# Altium PCB HUB_1P4.pcbdoc (part 2 of 2)
Units mil, origin at the board's own origin, x right, y up, seen from the top; angles counter-clockwise.
Board outline 4467.48 x 3480.02 mil, 2 copper layers (Top Layer, Bottom Layer); 207 components, 150 nets, 727 pads, 383 vias.
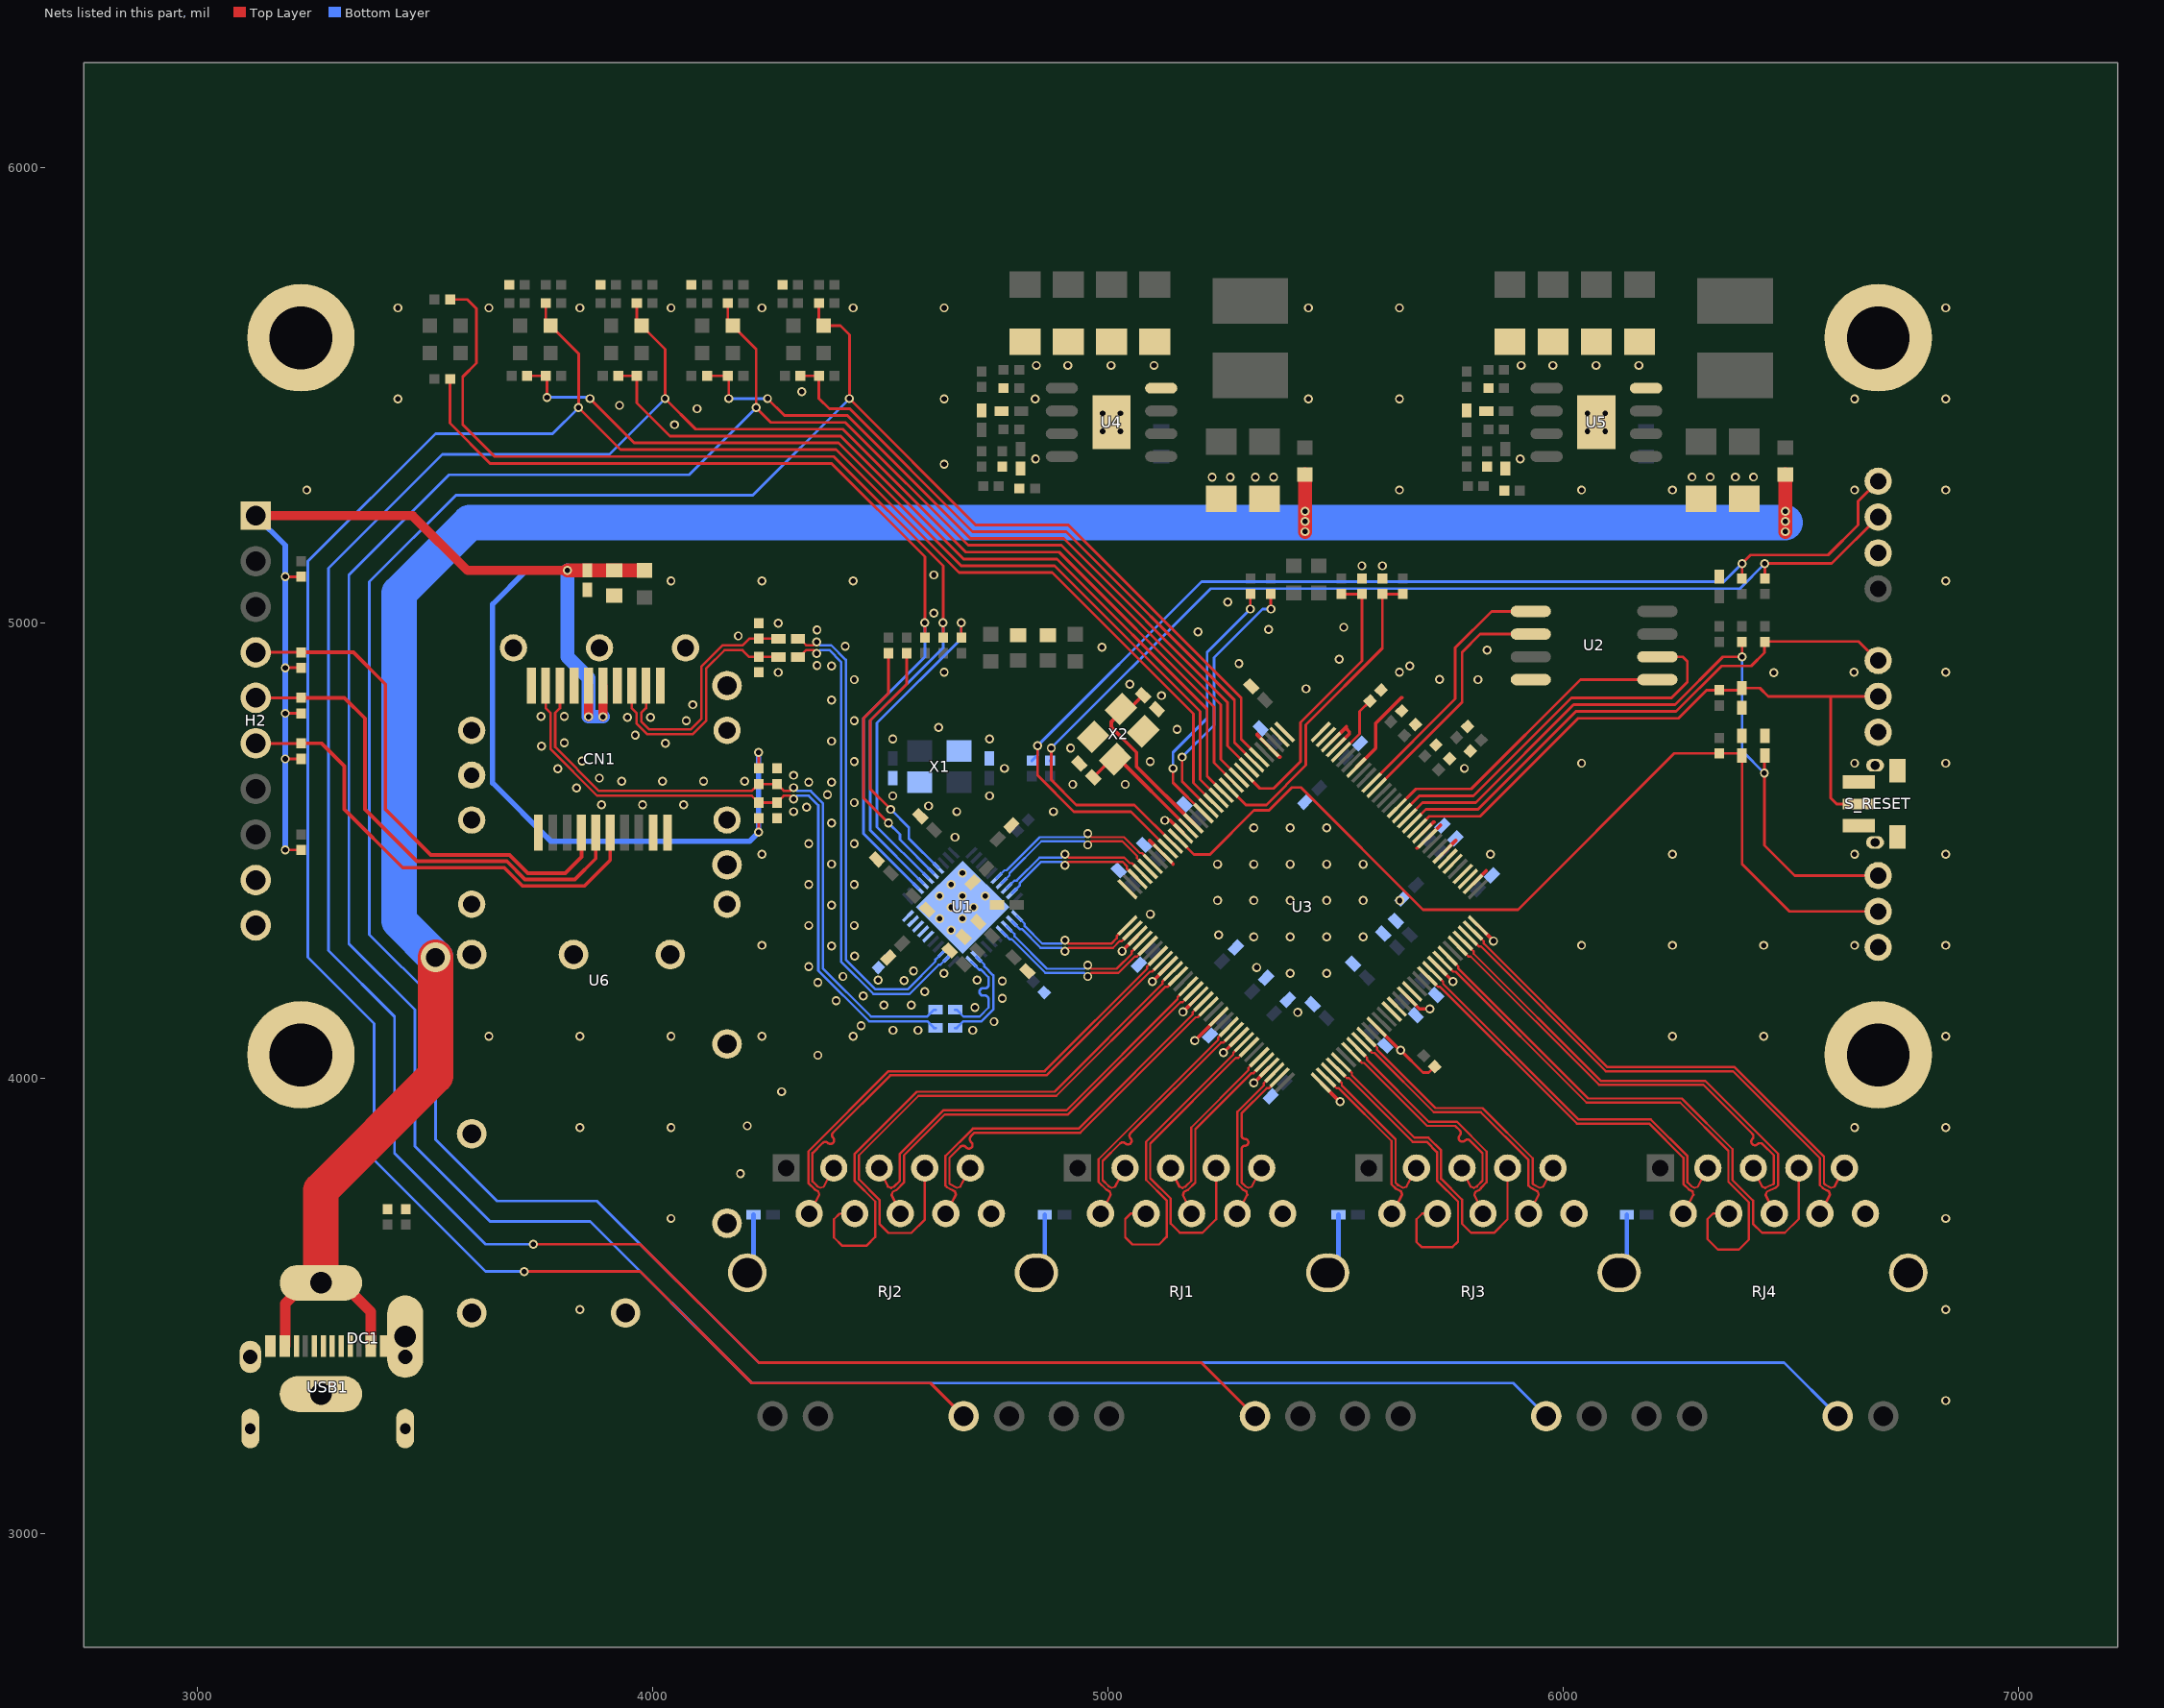
[diagram p2: the nets of this part, all layers, seen from the top]

## Via types
v1: diameter 19.68, hole 11.81, Top Layer to Bottom Layer, 250 vias
v2: diameter 19.6, hole 11.8, Top Layer to Bottom Layer, 64 vias
v3: diameter 20, hole 12, Top Layer to Bottom Layer, 36 vias
v4: diameter 24.02, hole 12.01, Top Layer to Bottom Layer, 16 vias
v5: diameter 24, hole 12, Top Layer to Bottom Layer, 15 vias
v6: diameter 34, hole 20, Top Layer to Bottom Layer, 1 vias
v7: diameter 65, hole 41, Top Layer to Bottom Layer, 1 vias

## Nets (pads, with @x,y where several pads share a name; then routed paths per layer and width w, separated by ;. In a path a pad name is that pad's centre, name@x,y a point inside that pad or via, vN(x,y) a via of type N, cw(c..) or ccw(c..) an arc to the next point about the centre after c; other vN are vias at no path point) (continued)
$5N1290: CN1.4 H2.4 R83.1 | length 1146
  Top Layer w6: H2.4@3127.44,4935.02 R83.1@3227.4,4935.02
  Top Layer w8: R83.1@3227.4,4935.02 3342.44,4935.02 3412.44,4865.02 3412.44,4590.02 3512.44,4490.02 3685.02,4490.02 3725.02,4450.02 3807.44,4450.02 3843.11,4485.69 CN1.4@3843.11,4539.24
$5N1291: CN1.5 H2.5 R86.1 | length 1105.8
  Top Layer w6: H2.5@3127.44,4835.02 R86.1@3227.4,4835.02
  Top Layer w8: R86.1@3227.4,4835.02 3322.44,4835.02 3367.44,4790.02 3367.44,4590.02 3481.44,4476.02 3679.22,4476.02 3719.22,4436.02 3828.44,4436.02 3874.61,4482.18 CN1.5@3874.61,4539.24
$5N1292: CN1.6 H2.6 R87.1 | length 1048
  Top Layer w6: H2.6@3127.44,4735.02 R87.1@3227.4,4735.02
  Top Layer w8: R87.1@3227.4,4735.02 3272.44,4735.02 3322.44,4685.02 3322.44,4590.02 3450.44,4462.02 3673.42,4462.02 3713.42,4422.02 3849.44,4422.02 3906.1,4478.68 CN1.6@3906.1,4539.24
DL: R23.1 R24.1 U3.76 | length 711.4
  Top Layer w6: U3.76@5265.16,4637.57 5302.71,4600.02 5347.44,4600.02 5434.44,4687.02 5434.44,4776.02 5602.44,4944.02 R24.1@5602.44,5062.98 R23.1@5647.44,5062.98
EN_PL: R25.1 R26.1 U3.73 | length 631.7
  Top Layer w6: U3.73@5298.54,4670.94 5333.49,4635.99 5363.42,4635.99 5422.44,4695.02 5422.44,4780.99 5557.44,4915.99 R26.1@5557.44,5062.98 R25.1@5512.44,5062.98
EN_SWR: R34.2 U3.60 | length 138.8
  Top Layer w6: U3.60@5511.8,4715.49 5552.44,4756.13 5552.44,4805.02 R34.2@5575.39,4827.97
GND: C1.2 C2.1 C3.1 C4.1 C5.1 C6.1 C7.1 C8.1 C9.1 C10.1 C11.1 C12.1 C13.1 C14.1 C15.1 C16.2 C17.2 C18.2 C19.2 C20.2 C21.2 C22.1 C23.1 C24.1 C25.1 C26.1 C27.1 C28.2 C29.1 C30.1 C31.1 C32.1 C33.2 C34.2 C35.1 C36.2 C37.1 C38.1 C39.1 C40.1 C41.1 C42.1 C43.1 C44.1 C45.1 C47.2 C48.2 C49.2 C50.2 C51.1 C52.1 C53.1 C54.1 C55.1 C57.2 C58.2 C59.2 C60.2 C61.1 C62.1 C63.1 C64.1 C65.1 C66.1 C67.1 C68.1 C69.1 C74.1 C75.1 CN1.1 CN1.9 CN1.10 CN1.11 CN1.14 CN1.17 CN1.20 DC1.2 DC1.3 GND.1 H2.9 H2.10 pad.1@6691.42,5625.73 pad.2@3226.85,5625.73 pad.3 pad.4@6691.42,4050.93 pad.7 pad.10 R9.1 R11.1 R15.1 R19.1 R24.2 R26.2 R29.1 R30.1 R31.1 R32.1 R33.1 R34.1 R41.1 R42.1 R43.2 R49.1 R50.1 R52.1 R53.1 R54.2 R58.1 R60.1 R70.1 R72.1 R84.1 R88.1 R91.1 R92.1 RJ1.P10 RJ1.SHIELD0 RJ1.SHIELD1 RJ2.P10 RJ2.SHIELD0 RJ2.SHIELD1 RJ3.P10 RJ3.SHIELD0 RJ3.SHIELD1 RJ4.P10 RJ4.SHIELD0 RJ4.SHIELD1 S_RESET.1 S_RESET.3 U1.16 U1.41 U2.4 U3.1 U3.12 U3.18 U3.24 U3.32 U3.34 U3.40 U3.43 U3.44 U3.57 U3.61 U3.62 U3.68 U3.85 U3.89 U3.96 U3.99 U3.105 U3.111 U3.115 U3.119 U3.125 U4.4 U4.9 U5.4 U5.9 U6.1 U6.2 U6.3 U6.4 U6.5 U6.6 U6.7 U6.8 U6.9 U6.10 U6.11 U6.12 U6.13 U6.14 U6.15 U6.16 U6.17 U6.18 U6.19 U6.20 USB1.1 USB1.A1B12 USB1.B1A12 X1.2 X1.4 X2.2 X2.4 | length 1922.4
  Top Layer w6: v3(5642.44,4061.02) 5691.44,4012.02 5704.44,4012.02 R19.1@5717.39,4024.97 ; 5677.44,4505.02 5679.91,4505.02 U3.43@5701.09,4526.2
  Top Layer w7.9: v3(5030.58,4278.82) U3.99@5064.7,4312.94 ; 5091.29,4521.81 U3.89@5120.35,4492.75 5142.44,4470.66 5142.44,4470.02 ; v3(5097.44,4212) U3.105@5131.56,4246.11 ; 5135.84,4566.35 U3.85@5164.89,4537.3 ; v3(5164.26,4145.18) U3.111@5198.38,4179.29 ; v3(5190.44,4082.02) 5190.44,4082.26 U3.115@5242.89,4134.74 ; v3(5253.36,4056.08) U3.119@5287.47,4090.2 ; v3(5320.11,3989.33) U3.125@5354.19,4023.45 ; 5327.44,4755.02 5327.44,4753.48 U3.68@5354.26,4726.66 5375.9,4705.02 5377.44,4705.02 ; U3.1@5467.25,3990 v3(5509.29,3948) ; U3.62@5489.53,4737.77 5523.58,4771.82 5523.58,4766.83 5529.68,4760.73 5529.68,4755.72 U3.61@5500.63,4726.66 ; U3.57@5545.18,4682.12 5587.5,4724.44 5587.5,4778.91 5644,4835.41 5645,4835.41 ; U3.12@5589.76,4112.47 5641.21,4061.02 v3(5642.44,4061.02) ; U3.18@5656.58,4179.29 5683.86,4152.02 v3(5706.44,4152.02) ; U3.44@5689.99,4537.3 5714.71,4562.02 5716.44,4562.02 ; U3.43@5701.09,4526.2 5730.15,4555.25 ; U3.24@5723.37,4246.11 v3(5757.52,4212) ; U3.40@5734.54,4492.75 5763.59,4521.81 ; U3.34@5801.29,4426 5830.34,4455.05 ; U3.32@5812.46,4335.21 v3(5846.62,4301.09)
  Bottom Layer w10: RJ2.SHIELD1@4207.48,3572.5 4220.98,3586 C65.1@4220.98,3700.02 ; RJ1.SHIELD1@4847.48,3572.5 4860.98,3586 C64.1@4860.98,3700.02 ; RJ3.SHIELD1@5487.48,3572.5 5505.98,3591 C66.1@5505.98,3700.02 ; RJ4.SHIELD1@6127.48,3572.5 6139.48,3584.5 C67.1@6139.48,3700.02
  other v1: 4192.44,3790.02 4207.44,3895.02 4282.44,3970.02 4362.44,4050.02 4527.44,4105.02 4582.44,4105.02 4702.44,4105.02 4457.44,4115.02 4749.44,4124.02 4707.44,4155.02 4507.44,4160.02 4567.44,4160.02 4402.44,4170.02 4767.44,4175.02 4462.44,4180.02 4597.44,4190.02 4362.44,4210.02 4767.44,4213.02 4551.44,4214.02 4495.04,4214.85 4712.44,4215.02 4417.44,4223.02 4639.44,4230.02 4572.44,4235.02 4342.44,4245.02 4443.44,4268.02 4392.44,4290.02 4655,4325.02 4342.44,4335.02 4442.44,4335.02 4630,4350.02 4680,4350.02 4655,4375.02 4705,4375.02 4392.44,4380.02 4630,4400.02 4680,4400.02 4730,4400.02 4342.44,4425.02 4442.44,4425.02 4655,4425.02 4680,4450.02 4392.44,4470.02 4342.44,4515.02 4442.44,4515.02 4663.42,4528.93 4392.44,4560.02 5124.44,4566.02 4309.44,4585.02 4667.44,4585.02 4880,4585.02 4337.44,4595.02 4605.45,4597.62 3887.44,4600.02 3977.44,4600.02 4067.44,4600.02 4442.44,4605.02 4527.05,4619.63 4739.19,4619.63 4383.44,4622.02 3832.44,4637.02 4922.44,4645.02 5037.44,4645.02 4342.44,4650.02 4392.44,4650.02 3931.44,4652.02 4021.44,4652.02 4111.44,4652.02 4201.44,4652.02 3882.48,4658.66 4309.33,4664.95 3791.44,4679.02 4772.44,4680.02 5782.44,4680.02 4442.44,4695.02 5092.44,4695.02 3844.44,4696.02 4917.44,4725.02 3755.44,4729.02 4027.44,4735.02 3805.44,4736.02 4392.44,4740.02 4527.05,4744.82 4739.73,4744.82 3961.44,4753.02 5151.42,4765.93 4627.44,4770.02 4073.44,4785.02 4442.44,4785.02 3943.99,4792.02 3994.44,4792.02 3754.34,4794.02 3805.44,4794.02 4087.44,4820.02 4392.44,4830.02 5117.44,4840.02 5435,4855.02 5047.44,4865.02 4442.44,4875.02 5812.44,4875.02 4275.44,4890.73 4392.44,4905.02 5662.44,4905.02 4360.44,4906.02 5287.44,4910.02 5507.44,4920.02 5832.44,4940.02 4986.42,4945.93 4422.44,4948.02 4187.44,4971.02 5197.44,4980.02 4360.44,4984.02 5352.44,4985.02 5517.44,4990.02 4275.44,4999.02 4617.44,5021.02 5262.44,5045.02 4617.44,5105.02 5557.44,5125.02 5602.44,5125.02 5228.4,5319.68 5268.4,5319.68 5323.4,5319.97 5363.4,5319.97 6282.44,5320.02 6322.44,5320.02 6377.44,5320.02 6417.44,5320.02 4840.44,5360.02 5905.44,5360.02 4047.44,5435.02 4097.44,5470.02 3926.81,5477.26 4326.81,5507.26 4842.44,5565.02 4911.62,5565.02 5006.55,5565.02 5100.84,5565.02 5907.44,5565.02 5976.62,5565.02 6071.55,5565.02 6165.84,5565.02
  other v2: 6839.8,3291.52 3839.8,3491.52 6839.8,3491.52 4039.8,3691.52 6839.8,3691.52 3839.8,3891.52 4039.8,3891.52 6639.8,3891.52 6839.8,3891.52 3639.8,4091.52 3839.8,4091.52 4039.8,4091.52 4239.8,4091.52 4439.8,4091.52 6239.8,4091.52 6439.8,4091.52 6839.8,4091.52 4239.8,4291.52 6039.8,4291.52 6239.8,4291.52 6439.8,4291.52 6639.8,4291.52 6839.8,4291.52 4239.8,4491.52 5839.8,4491.52 6239.8,4491.52 6639.8,4491.52 6839.8,4491.52 6039.8,4691.52 6639.8,4691.52 6839.8,4691.52 6462.44,4890.02 4639.8,4891.52 5639.8,4891.52 6638.14,4891.52 6839.8,4891.52 4039.8,5091.52 4239.8,5091.52 4439.8,5091.52 6839.8,5091.52 3239.8,5291.52 5639.8,5291.52 6039.8,5291.52 6239.8,5291.52 6639.8,5291.52 6839.8,5291.52 4639.8,5347.88 3439.8,5491.52 4639.8,5491.52 4839.8,5491.52 5439.8,5491.52 5639.8,5491.52 6639.8,5491.52 6839.8,5491.52 3439.8,5691.52 3639.8,5691.52 3839.8,5691.52 4039.8,5691.52 4239.8,5691.52 4439.8,5691.52 4639.8,5691.52 5439.8,5691.52 5639.8,5691.52 6839.8,5691.52
  other v3: 5416.44,4144.02 5400.11,4229.81 5480.11,4229.81 5326.44,4243.02 5320.11,4309.81 5400.11,4309.81 5480.11,4309.81 5560.11,4309.81 5242.44,4314.02 5092.44,4360.02 5240.11,4389.81 5320.11,4389.81 5400.11,4389.81 5480.11,4389.81 5560.11,4389.81 5640.11,4389.81 5240.11,4469.81 5320.11,4469.81 5400.11,4469.81 5480.11,4469.81 5560.11,4469.81 5320.11,4549.81 5400.11,4549.81 5480.11,4549.81 5728.01,4875.72
GPIO03: C35.2 GPIO03.1 pad.8 R28.1 U3.47 | length 1672.2
  Top Layer w6: U3.47@5656.58,4570.75 5690.86,4605.02 5807.44,4605.02 6022.44,4820.02 6245.47,4820.02 6350.47,4925.02 v1(6392.44,4925.02) R28.1@6392.44,4957.98 ; C35.2@6441.42,4714.47 v1(6441.42,4669.62) 6441.42,4511.04 6507.84,4444.63 pad.8@6691.42,4444.63
  Bottom Layer w6: v1(6392.44,4925.02) 6392.44,4718.59 v1(6441.42,4669.62)
HSIN: C73.2 U1.13 | length 1066.5
  Top Layer w5.4: C73.2@4318.9,4965.02 4322.44,4965.02 4337.04,4950.42 4352.76,4950.42 v1(4360.1,4957.76)
  Bottom Layer w5.4: v1(4360.1,4957.76) 4367.44,4950.42 4391.75,4950.42 4423.9,4918.27 4423.9,4259.77 4488.65,4195.02 4559.46,4195.02 4620.72,4256.28 4620.72,4260.06 U1.13@4638.26,4277.6
HSIP: C72.2 U1.12 | length 1075.3
  Top Layer w5.4: C72.2@4318.9,4925.02 4322.44,4925.02 4337.44,4940.02 4352.76,4940.02 v1(4360.1,4932.68)
  Bottom Layer w5.4: v1(4360.1,4932.68) 4367.44,4940.02 4387.44,4940.02 4413.5,4913.96 4413.5,4255.46 4484.34,4184.62 4563.77,4184.62 4628.07,4248.93 4631.86,4248.93 U1.12@4649.4,4266.46
HSON: C70.2 U1.9 | length 232
  Bottom Layer w5.4: C70.2@4663.9,4110.02 4667.44,4110.02 4682.04,4124.62 4721.75,4124.62 4747.84,4150.71 4747.84,4225.44 4728.14,4245.14 4728.14,4248.93 U1.9@4710.6,4266.46
HSOP: C71.2 U1.10 | length 232.3
  Bottom Layer w5.4: C71.2@4663.9,4150.02 4667.44,4150.02 4682.44,4135.02 4717.44,4135.02 4737.44,4155.02 4737.44,4172.97 ccw(c4729.34,4172.97) 4729.34,4181.07 4725.59,4181.07 cw(c4725.59,4189.17) 4717.49,4189.17 cw(c4725.59,4189.17) 4725.59,4197.27 4729.34,4197.27 ccw(c4729.34,4205.37) 4737.44,4205.37 4737.44,4221.14 4720.79,4237.79 4717.01,4237.79 U1.10@4699.47,4255.33
HW_RESTE: C26.2 HW_RESET.1 pad.9 R18.1 U3.86 | length 2149.5
  Top Layer w6: U3.86@5153.79,4526.2 5188.74,4491.25 5223.67,4491.25 5320.44,4588.02 5353.44,4588.02 5403.44,4638.02 5423.44,4638.02 5691.44,4370.02 5900.51,4370.02 6243.47,4712.98 R18.1@6342.44,4712.98 6388.02,4712.98 C26.2@6392.44,4708.56 6392.44,4470.02 6496.58,4365.89 pad.9@6691.42,4365.89
P0_LED0: R56.2 U3.81 | length 579.3
  Top Layer w6: v1(5142.44,4680.02) 5142.44,4648.85 U3.81@5209.44,4581.85 ; v1(5312.44,5030.02) R56.2@5312.44,5062.98
  Bottom Layer w6: v1(5142.44,4680.02) 5142.44,4715.02 5217.44,4790.02 5217.44,4935.02 v1(5312.44,5030.02)
P0_LED1: R55.2 U3.80 | length 585.6
  Top Layer w6: v1(5162.44,4705.02) 5162.44,4651.19 U3.80@5220.61,4593.02 ; v1(5357.44,5030.02) R55.2@5357.44,5062.98
  Bottom Layer w6: v1(5162.44,4705.02) 5232.44,4775.02 5232.44,4923.37 5339.09,5030.02 v1(5357.44,5030.02)
P0MDIAN: U1.37 U3.92 | length 396.1
  Top Layer w5: v1(4955.28,4512.18) 4963.13,4520.02 5031.14,4520.02 5063.32,4487.84 5063.32,4483.03 U3.92@5086.97,4459.38
  Bottom Layer w5: U1.37@4766.28,4427.9 4783.4,4445.01 4783.4,4449.78 4853.63,4520.02 4947.44,4520.02 v1(4955.28,4512.18)
P0MDIAP: U1.36 U3.91 | length 411
  Top Layer w5: v1(4955.28,4536.86) 4963.13,4529.02 5034.86,4529.02 5069.68,4494.2 5074.49,4494.2 U3.91@5098.14,4470.55
  Bottom Layer w5: U1.36@4755.14,4439.03 4772.26,4456.15 4777.03,4456.15 4849.9,4529.02 4947.44,4529.02 v1(4955.28,4536.86)
P0MDIBN: U1.39 U3.94 | length 332.7
  Top Layer w5: v1(4905.28,4467.18) 4913.13,4475.02 5031.59,4475.02 5041.04,4465.57 5041.04,4460.76 U3.94@5064.7,4437.1
  Bottom Layer w5: U1.39@4788.56,4405.62 4805.67,4422.74 4805.67,4427.51 4853.18,4475.02 4897.44,4475.02 v1(4905.28,4467.18)
P0MDIBP: U1.38 U3.93 | length 347.6
  Top Layer w5: v1(4905.28,4491.86) 4913.13,4484.02 5035.32,4484.02 5047.41,4471.93 5052.22,4471.93 U3.93@5075.87,4448.28
  Bottom Layer w5: U1.38@4777.42,4416.76 4794.53,4433.87 4799.31,4433.87 4849.45,4484.02 4897.44,4484.02 v1(4905.28,4491.86)
P0MDICN: U1.2 U3.98 | length 311.4
  Top Layer w5: v1(4905.28,4278.18) 4913.13,4286.02 5010.7,4286.02 5025.13,4300.45 5029.87,4300.45 U3.98@5053.52,4324.11
  Bottom Layer w5: U1.2@4788.56,4344.42 4805.67,4327.3 4810.44,4327.3 4851.72,4286.02 4897.44,4286.02 v1(4905.28,4278.18)
P0MDICP: U1.1 U3.97 | length 296.5
  Top Layer w5: v1(4905.28,4302.86) 4913.13,4295.02 5006.97,4295.02 5018.77,4306.82 5018.77,4311.56 U3.97@5042.42,4335.21
  Bottom Layer w5: U1.1@4799.69,4355.55 4816.81,4338.44 4816.81,4333.67 4855.45,4295.02 4897.44,4295.02 v1(4905.28,4302.86)
P0MDIDN: U1.4 U3.101 | length 389.6
  Top Layer w5: v1(4955.28,4223.18) 4963.13,4231.02 5022.52,4231.02 5058.51,4267.01 5063.32,4267.01 U3.101@5086.97,4290.66
  Bottom Layer w5: U1.4@4766.28,4322.14 4783.4,4305.03 4788.17,4305.03 4862.18,4231.02 4947.44,4231.02 v1(4955.28,4223.18)
P0MDIDP: U1.3 U3.100 | length 374.7
  Top Layer w5: v1(4955.28,4247.86) 4963.13,4240.02 5018.79,4240.02 5052.14,4273.37 5052.14,4278.18 U3.100@5075.8,4301.83
  Bottom Layer w5: U1.3@4777.42,4333.28 4794.53,4316.16 4794.53,4311.39 4865.9,4240.02 4947.44,4240.02 v1(4955.28,4247.86)
P1_LED0: LED5.1 R62.2 RJ2.13 U3.79 | length 5740.4
  Top Layer w6: v1(3717.44,3575.02) 3972.44,3575.02 4217.44,3330.02 4609.86,3330.02 RJ2.13@4682.48,3257.4 ; R62.2@3764.77,5702.26 3764.77,5662.77 3836.81,5590.73 v1(3836.81,5472.26) 3929.05,5380.02 4402.44,5380.02 4672.44,5110.02 4877.44,5110.02 5187.44,4800.02 5187.44,4648.4 U3.79@5231.71,4604.12
  Bottom Layer w6: v1(3717.44,3575.02) 3632.44,3575.02 3387.44,3820.02 3387.44,4120.02 3242.44,4265.02 3242.44,5135.02 3522.44,5415.02 3779.57,5415.02 v1(3836.81,5472.26)
P1_LED1: R65.2 R68.2 U3.78 | length 2013.1
  Top Layer w6: R65.2@3723.85,5542.26 R68.2@3764.77,5542.26 ; v1(3767.44,5495.02) R68.2@3767.44,5539.93 ; v1(3861.81,5492.26) 3959.05,5395.02 4407.44,5395.02 4677.44,5125.02 4882.44,5125.02 5202.44,4805.02 5202.44,4655.74 U3.78@5242.89,4615.29
  Bottom Layer w6: v1(3767.44,5495.02) 3859.05,5495.02 v1(3861.81,5492.26)
P1MDIAN: RJ2.P3 U3.104 | length 1102
  Top Layer w5: RJ2.P3@4397.28,3802.4 4374.98,3761.03 4367.8,3758.88 4361.19,3762.44 4350.55,3773.08 4350.55,3835.02 4373.12,3857.6 cw(c4378.78,3851.94) 4384.44,3857.6 ccw(c4390.09,3863.25) 4395.75,3857.6 ccw(c4390.09,3863.25) 4395.75,3868.91 cw(c4401.41,3874.57) 4395.75,3880.22 4521.55,4006.02 4864.38,4006.02 5091.99,4233.63 5096.73,4233.63 U3.104@5120.38,4257.29
P1MDIAP: RJ2.P2 U3.103 | length 1101.3
  Top Layer w5: RJ2.P2@4343.38,3702.4 4365.68,3743.77 4363.53,3750.95 4355.76,3755.14 4341.55,3769.36 4341.55,3838.75 4517.82,4015.02 4860.65,4015.02 5085.63,4240 5085.63,4244.73 U3.103@5109.28,4268.39
P1MDIBN: RJ2.P7 U3.107 | length 1266.9
  Top Layer w5: RJ2.P7@4597.28,3802.4 4597.42,3802.26 4597.42,3689.46 4567.62,3659.66 4517.62,3659.66 4497.62,3679.66 4497.62,3732.61 4452.48,3777.75 4452.48,3830.02 4583.48,3961.02 4886.2,3961.02 5125.37,4200.19 5130.18,4200.19 U3.107@5153.79,4223.84
P1MDIBP: RJ2.P4 U3.106 | length 1267
  Top Layer w5: RJ2.P4@4443.38,3702.4 4443.02,3702.04 4410,3702.04 4397.62,3689.66 4397.62,3649.88 4415.88,3631.62 4469.08,3631.62 4488.62,3651.16 4488.62,3728.88 4443.48,3774.02 4443.48,3833.75 4579.75,3970.02 4882.47,3970.02 5119,4206.55 5119,4211.36 U3.106@5142.66,4235.01
P1MDICN: RJ2.P6 U3.110 | length 929.3
  Top Layer w5: RJ2.P6@4543.38,3702.4 4524.43,3743.5 4527.03,3750.53 4535.3,3754.35 4551.48,3770.53 4551.48,3830.02 4641.48,3920.02 4912.02,3920.02 5158.81,4166.81 5163.55,4166.81 U3.110@5187.17,4190.46
P1MDICP: RJ2.P5 U3.109 | length 926
  Top Layer w5: RJ2.P5@4497.28,3802.4 4516.23,3761.3 4523.26,3758.71 4530.07,3761.85 4542.48,3774.25 4542.48,3833.75 4637.75,3929.02 4908.29,3929.02 5152.45,4173.18 5152.45,4177.91 U3.109@5176.07,4201.57
P1MDIDN: RJ2.P9 U3.113 | length 859.8
  Top Layer w5: RJ2.P9@4697.28,3802.4 4674.98,3761.03 4667.8,3758.88 4651.58,3767.62 4651.58,3825.02 4675.57,3849.01 cw(c4681.23,3843.36) 4686.89,3849.01 4688.52,3847.38 ccw(c4694.18,3853.03) 4699.84,3847.38 ccw(c4694.18,3853.03) 4699.84,3858.69 4698.2,3860.33 cw(c4703.86,3865.99) 4698.2,3871.64 4706.58,3880.02 4938.84,3880.02 5192.19,4133.37 5197,4133.37 U3.113@5220.65,4157.02
P1MDIDP: RJ2.P8 U3.112 | length 854.5
  Top Layer w5: RJ2.P8@4643.38,3702.4 4665.68,3743.77 4663.53,3750.95 4646.15,3760.32 4642.58,3763.89 4642.58,3828.75 4702.85,3889.02 4935.12,3889.02 5185.83,4139.73 5185.83,4144.54 U3.112@5209.48,4168.19
P2_LED0: LED6.1 R61.2 RJ1.13 U3.75 | length 6274.3
  Top Layer w6: v1(3737.44,3635.02) 3972.44,3635.02 4232.44,3375.02 5204.86,3375.02 RJ1.13@5322.48,3257.4 ; R61.2@3964.77,5702.26 3964.77,5662.77 4026.81,5600.73 v1(4026.81,5492.26) 4094.05,5425.02 4417.44,5425.02 4687.44,5155.02 4892.44,5155.02 5232.44,4815.02 5232.44,4692.49 U3.75@5276.26,4648.67
  Bottom Layer w6: v1(3737.44,3635.02) 3632.44,3635.02 3432.44,3835.02 3432.44,4135.02 3287.44,4280.02 3287.44,5120.02 3537.44,5370.02 3904.57,5370.02 v1(4026.81,5492.26)
P2_LED1: R63.2 R67.2 U3.77 | length 1830.6
  Top Layer w6: R63.2@3923.85,5542.26 R67.2@3964.77,5542.26 3964.77,5482.69 4037.44,5410.02 4412.44,5410.02 4682.44,5140.02 4887.44,5140.02 5217.44,4810.02 5217.44,4662.94 U3.77@5253.99,4626.4
P2MDIAN: RJ1.P3 U3.118 | length 546.8
  Top Layer w5: RJ1.P3@5037.28,3802.4 5014.98,3761.03 5007.8,3758.88 5001.19,3762.44 4988.05,3775.58 4988.05,3817.85 5026.53,3856.34 cw(c5032.19,3850.68) 5037.84,3856.34 ccw(c5043.5,3861.99) 5049.16,3856.34 ccw(c5043.5,3861.99) 5049.16,3867.65 cw(c5054.81,3873.31) 5049.16,3878.96 5247.91,4077.72 5252.65,4077.72 U3.118@5276.26,4101.37
P2MDIAP: RJ1.P2 U3.117 | length 546.1
  Top Layer w5: RJ1.P2@4983.38,3702.4 5005.68,3743.77 5003.53,3750.95 4995.76,3755.14 4979.05,3771.86 4979.05,3821.58 5241.55,4084.08 5241.55,4088.82 U3.117@5265.16,4112.47
P2MDIBN: RJ1.P7 U3.121 | length 732.2
  Top Layer w5: RJ1.P7@5237.28,3802.4 5237.28,3690.16 5207.48,3660.36 5157.48,3660.36 5137.48,3680.36 5137.48,3735.02 5092.48,3780.02 5092.48,3856.31 5280.44,4044.27 5286.09,4044.27 U3.121@5309.71,4067.92
P2MDIBP: RJ1.P4 U3.120 | length 731.7
  Top Layer w5: RJ1.P4@5083.38,3702.4 5083.04,3702.74 5049.86,3702.74 5037.48,3690.36 5037.48,3650.02 5053.08,3634.42 5111.88,3634.42 5128.48,3651.02 5128.48,3731.29 5083.48,3776.29 5083.48,3860.04 5274.92,4051.48 5274.92,4055.44 U3.120@5298.57,4079.1
P2MDICN: RJ1.P6 U3.124 | length 414.4
  Top Layer w5: RJ1.P6@5183.38,3702.4 5164.43,3743.5 5167.03,3750.53 5175.3,3754.35 5191.48,3770.53 5191.48,3887.71 5314.66,4010.89 5319.47,4010.89 U3.124@5343.08,4034.55
P2MDICP: RJ1.P5 U3.123 | length 411.2
  Top Layer w5: RJ1.P5@5137.28,3802.4 5156.23,3761.3 5163.26,3758.71 5170.07,3761.85 5182.48,3774.25 5182.48,3891.44 5308.3,4017.26 5308.3,4022.07 U3.123@5331.95,4045.72
P2MDIDN: RJ1.P9 U3.127 | length 358.6
  Top Layer w5: RJ1.P9@5337.28,3802.4 5314.98,3761.03 5307.8,3758.88 5301.19,3762.44 5293.05,3770.58 5293.05,3843.87 cw(c5300.55,3843.87) 5300.55,3851.37 ccw(c5300.55,3858.87) 5308.05,3858.87 ccw(c5300.55,3858.87) 5300.55,3866.37 cw(c5300.55,3873.87) 5293.05,3873.87 5293.05,3922.46 5348.11,3977.52 5352.84,3977.52 U3.127@5376.46,4001.17
P2MDIDP: RJ1.P8 U3.126 | length 359
  Top Layer w5: RJ1.P8@5283.38,3702.4 5305.68,3743.77 5303.53,3750.95 5295.76,3755.14 5284.05,3766.86 5284.05,3926.19 5341.74,3983.88 5341.74,3988.62 U3.126@5365.36,4012.27
P3_LED0: LED8.2 R73.2 RJ3.13 U3.74 | length 6815.3
  Top Layer w6: R73.2@4164.77,5702.26 4164.77,5662.77 4226.81,5600.73 v1(4226.81,5472.26) 4259.05,5440.02 4422.44,5440.02 4692.44,5170.02 4897.44,5170.02 5247.44,4820.02 5247.44,4699.84 U3.74@5287.44,4659.84
  Bottom Layer w6: v1(4226.81,5472.26) 4079.57,5325.02 3552.44,5325.02 3332.44,5105.02 3332.44,4295.02 3477.44,4150.02 3477.44,3850.02 3642.44,3685.02 3862.44,3685.02 4217.44,3330.02 5889.86,3330.02 RJ3.13@5962.48,3257.4
P3_LED1: R75.2 R79.2 U3.72 | length 1631.3
  Top Layer w6: R75.2@4118.85,5542.26 R79.2@4164.77,5542.26 4166.81,5540.22 v1(4166.81,5492.26) ; v1(4251.81,5492.26) 4289.05,5455.02 4427.44,5455.02 4697.44,5185.02 4902.44,5185.02 5262.44,4825.02 5262.44,4729.38 U3.72@5309.71,4682.12
  Bottom Layer w6: v1(4166.81,5492.26) v1(4251.81,5492.26)
P3LED0: R1.1 U1.27 | length 566.8
  Top Layer w6: v1(4522.44,4590.02) 4477.44,4635.02 4477.44,4785.02 4557.44,4865.02 R1.1@4557.44,4932.98
  Bottom Layer w6: v1(4522.44,4590.02) 4562.44,4550.02 4562.44,4525.98 U1.27@4627.12,4461.3
P3LED1: R95.1 U1.26 | length 569.2
  Top Layer w6: v1(4517.44,4560.02) 4462.44,4615.02 4462.44,4790.02 4517.44,4845.02 R95.1@4517.44,4932.98
  Bottom Layer w6: v1(4517.44,4560.02) 4542.44,4535.02 4542.44,4523.71 U1.26@4615.99,4450.16
P3LED2: R2.2 U1.25 | length 717.1
  Top Layer w6: R2.2@4677.44,4967.06 v1(4677.44,5000.02)
  Bottom Layer w6: U1.25@4604.86,4439.03 4492.44,4551.45 4492.44,4780.02 4677.44,4965.02 v1(4677.44,5000.02)
P3MDIAN: RJ3.P3 U3.3 | length 375.5
  Top Layer w5: U3.3@5489.56,4012.27 5513.22,3988.62 5513.22,3983.88 5631.48,3865.62 5631.48,3770.02 5636.57,3764.93 5647.8,3758.88 5654.98,3761.03 RJ3.P3@5677.28,3802.4
P3MDIAP: RJ3.P2 U3.2 | length 378.1
  Top Layer w5: U3.2@5478.46,4001.17 5502.12,3977.52 5506.85,3977.52 5622.48,3861.89 5622.48,3766.29 5631.14,3757.63 5643.53,3750.95 5645.68,3743.77 RJ3.P2@5623.38,3702.4
P3MDIBN: RJ3.P7 U3.5 | length 715.7
  Top Layer w5: U3.5@5511.8,4034.55 5535.49,4010.89 5535.49,4006.16 5672.63,3869.02 5703.48,3869.02 5731.48,3841.02 5731.48,3778.75 5777.48,3732.75 5777.48,3680 5797.48,3660 5847.48,3660 5877.28,3689.8 RJ3.P7@5877.28,3802.4
P3MDIBP: RJ3.P4 U3.4 | length 715.7
  Top Layer w5: U3.4@5500.7,4023.45 5524.39,3999.79 5529.13,3999.79 5668.9,3860.02 5699.75,3860.02 5722.48,3837.29 5722.48,3775.02 5768.48,3729.02 5768.48,3641.02 5756.48,3629.02 5688.48,3629.02 5677.48,3640.02 5677.48,3690 5689.86,3702.38 RJ3.P4@5723.38,3702.4
P3MDICN: RJ3.P6 U3.8 | length 536.9
  Top Layer w5: U3.8@5545.18,4067.92 5568.87,4044.27 5568.87,4039.53 5704.38,3904.02 5766.21,3904.02 5831.48,3838.75 5831.48,3771.29 5819.07,3758.89 5819.07,3758.12 5815.3,3754.35 5807.03,3750.53 5804.43,3743.5 RJ3.P6@5823.38,3702.4
P3MDICP: RJ3.P5 U3.7 | length 537.1
  Top Layer w5: U3.7@5534.07,4056.82 5557.77,4033.17 5562.5,4033.17 5700.65,3895.02 5762.48,3895.02 5772.26,3885.24 cw(c5766.6,3879.58) 5772.26,3873.93 ccw(c5777.92,3868.27) 5772.26,3862.61 ccw(c5777.92,3868.27) 5783.57,3862.61 cw(c5789.23,3856.95) 5794.89,3862.61 5822.48,3835.02 5822.48,3775.02 5810.07,3762.61 5810.07,3761.85 5803.26,3758.71 5796.23,3761.3 RJ3.P5@5777.28,3802.4
P3MDIDN: RJ3.P9 U3.10 | length 606.5
  Top Layer w5: U3.10@5567.49,4090.2 5591.14,4066.54 5591.14,4061.81 5718.93,3934.02 5822.21,3934.02 5932.48,3823.75 5932.48,3767.54 5933.36,3766.66 5947.8,3758.88 5954.98,3761.03 RJ3.P9@5977.28,3802.4
P3MDIDP: RJ3.P8 U3.9 | length 609.1
  Top Layer w5: U3.9@5556.39,4079.1 5580.04,4055.44 5584.78,4055.44 5715.2,3925.02 5818.48,3925.02 5923.48,3820.02 5923.48,3763.81 5927.93,3759.36 5943.53,3750.95 5945.68,3743.77 RJ3.P8@5923.38,3702.4
P4_LED0: LED10.1 R74.2 RJ4.13 U3.70 | length 7376.8
  Top Layer w6: R74.2@4364.77,5702.26 4364.77,5662.77 LED10.1@4375.31,5652.26 4411.81,5652.26 4431.81,5632.26 v1(4431.81,5492.26) 4709.05,5215.02 4912.44,5215.02 5292.44,4835.02 5292.44,4743.93 U3.70@5331.98,4704.39
  Bottom Layer w6: v1(4431.81,5492.26) 4219.57,5280.02 3567.44,5280.02 3377.44,5090.02 3377.44,4315.02 3522.44,4170.02 3522.44,3865.02 3657.44,3730.02 3877.44,3730.02 4232.44,3375.02 6484.86,3375.02 RJ4.13@6602.48,3257.4
P4_LED1: R77.2 R80.2 U3.71 | length 1432.4
  Top Layer w6: R77.2@4323.85,5542.26 R80.2@4364.77,5542.26 4364.77,5492.69 4387.44,5470.02 4432.44,5470.02 4702.44,5200.02 4907.44,5200.02 5277.44,4830.02 5277.44,4736.59 U3.71@5320.81,4693.22
P4MDIAN: RJ4.P3 U3.23 | length 863.2
  Top Layer w5: U3.23@5712.26,4235.01 5735.96,4211.36 5735.96,4206.55 6033.49,3909.02 6192.21,3909.02 6272.48,3828.75 6272.48,3771.15 6281.19,3762.44 6287.8,3758.88 6294.98,3761.03 RJ4.P3@6317.28,3802.4
P4MDIAP: RJ4.P2 U3.22 | length 865.8
  Top Layer w5: U3.22@5701.09,4223.84 5724.78,4200.19 5729.59,4200.19 6029.76,3900.02 6188.48,3900.02 6263.48,3825.02 6263.48,3767.42 6275.76,3755.14 6283.53,3750.95 6285.68,3743.77 RJ4.P2@6263.38,3702.4
P4MDIBN: RJ4.P7 U3.26 | length 1220
  Top Layer w5: U3.26@5745.68,4268.39 5769.33,4244.73 5769.33,4240 6054.31,3955.02 6260.21,3955.02 6371.48,3843.75 6371.48,3776.02 6416.48,3731.02 6416.48,3680.15 6436.48,3660.15 6486.48,3660.15 6517.28,3690.95 RJ4.P7@6517.28,3802.4
P4MDIBP: RJ4.P4 U3.25 | length 1220
  Top Layer w5: U3.25@5734.58,4257.29 5758.23,4233.63 5762.97,4233.63 6050.58,3946.02 6256.48,3946.02 6362.48,3840.02 6362.48,3772.29 6407.48,3727.29 6407.48,3645.02 6385.78,3623.32 6339.18,3623.32 6316.48,3646.02 6316.48,3690.15 6328.86,3702.53 6363.25,3702.53 RJ4.P4@6363.38,3702.4
P4MDICN: RJ4.P6 U3.29 | length 1039.6
  Top Layer w5: U3.29@5779.09,4301.83 5802.78,4278.18 5802.78,4273.37 6082.13,3994.02 6311.21,3994.02 6471.48,3833.75 6471.48,3764.36 6466.74,3759.62 6447.03,3750.53 6444.43,3743.5 RJ4.P6@6463.38,3702.4
P4MDICP: RJ4.P5 U3.28 | length 1039.7
  Top Layer w5: U3.28@5767.95,4290.66 5791.61,4267.01 5796.41,4267.01 6078.4,3985.02 6307.48,3985.02 6415.07,3877.43 cw(c6409.42,3871.77) 6415.07,3866.11 ccw(c6420.73,3860.45) 6415.07,3854.8 ccw(c6420.73,3860.45) 6426.39,3854.8 cw(c6432.04,3849.14) 6437.7,3854.8 6462.48,3830.02 6462.48,3768.09 6461.51,3767.12 6443.26,3758.71 6436.23,3761.3 RJ4.P5@6417.28,3802.4
P4MDIDN: RJ4.P9 U3.31 | length 1111.5
  Top Layer w5: U3.31@5801.36,4324.11 5825.05,4300.45 5825.05,4295.65 6096.68,4024.02 6376.21,4024.02 6572.48,3827.75 6572.48,3768.5 6575.45,3765.53 6587.8,3758.88 6594.98,3761.03 RJ4.P9@6617.28,3802.4
P4MDIDP: RJ4.P8 U3.30 | length 1114.1
  Top Layer w5: U3.30@5790.19,4312.94 5813.88,4289.28 5818.69,4289.28 6092.95,4015.02 6372.48,4015.02 6563.48,3824.02 6563.48,3764.77 6570.02,3758.23 6583.53,3750.95 6585.68,3743.77 RJ4.P8@6563.38,3702.4
P6LED0: R3.1 R6.1 U1.24 | length 2361.6
  Top Layer w6: R6.1@3554.48,5710.02 3592.44,5710.02 3612.44,5690.02 3612.44,5570.02 3582.44,5540.02 3582.44,5435.02 3652.44,5365.02 4397.44,5365.02 4637.44,5125.02 v1(4637.44,5000.02) R3.1@4637.44,4967.06
  Bottom Layer w6: U1.24@4593.72,4427.9 4477.44,4544.17 4477.44,4785.02 4637.44,4945.02 v1(4637.44,5000.02)
P6LED1: R4.1 R5.1 U1.23 | length 2128.2
  Top Layer w6: R5.1@3554.48,5535.02 3554.48,5437.98 3642.44,5350.02 4392.44,5350.02 4597.44,5145.02 v1(4597.44,5000.02) R4.1@4597.44,4967.06
  Bottom Layer w6: U1.23@4582.58,4416.76 4462.44,4536.9 4462.44,4790.02 4597.44,4925.02 v1(4597.44,5000.02)
RXD/GPIO01: C74.2 pad.6 R20.1 RX.1 S_RESET.2 U3.45 | length 1443.9
  Top Layer w6: U3.45@5678.86,4548.47 5705.4,4575.02 5817.44,4575.02 6032.44,4790.02 6252.44,4790.02 6314.48,4852.06 R20.1@6342.44,4852.06 6388.02,4852.06 C74.2@6392.44,4856.48 6431.62,4856.48 6449.77,4838.33 6584.21,4838.33 ; S_RESET.2@6649.12,4602.11 6600.36,4602.11 6587.44,4615.02 6587.44,4835.09 ; pad.6@6691.42,4838.33 6590.68,4838.33 ; 6584.21,4838.33 6587.44,4835.09 ; 6584.21,4838.33 6590.68,4838.33 ; 6587.44,4835.09 6590.68,4838.33
SCK: pad.2@6691.42,5232.03 R8.2 R94.1 SCK.1 U3.87 | length 2484
  Top Layer w6: v1(4875,4725.02) 4875,4655.02 4930,4600.02 5057.63,4600.02 U3.87@5142.62,4515.03 ; R94.1@6442.44,5097.06 v1(6442.44,5130.02) 6589.41,5130.02 pad.2@6691.42,5232.03
  Bottom Layer w6: R8.2@4872.44,4697.06 4875,4699.62 v1(4875,4725.02) 5225,5075.02 6387.44,5075.02 v1(6442.44,5130.02)
SDA: pad.1@6691.42,5310.77 R7.2 R93.1 SDA.1 U3.88 | length 2606.7
  Top Layer w6: v1(4845,4730.02) 4845,4665.02 4925,4585.02 5050.42,4585.02 U3.88@5131.52,4503.93 ; R93.1@6392.44,5097.06 v1(6392.44,5130.02) 6411.28,5148.86 6581.28,5148.86 6647.44,5215.02 6647.44,5266.79 pad.1@6691.42,5310.77
  Bottom Layer w6: R7.2@4832.44,4697.06 4845,4709.62 v1(4845,4730.02) 5205,5090.02 6352.44,5090.02 v1(6392.44,5130.02)
SFP_3V3: C68.2 C69.2 CN1.15 CN1.16 H2.1 R81.2 R82.2 R83.2 R85.2 R86.2 R87.2 R89.2 R90.2 | length 3822.8
  Top Layer w6: v1(3192.44,4501.02) R90.2@3227.4,4501.02 ; v1(3192.44,4701.02) R87.2@3227.4,4701.02 ; v1(3192.44,4801.02) R86.2@3227.4,4801.02 ; v1(3192.44,4901.02) R83.2@3227.4,4901.02 ; v1(3192.44,5101.02) R82.2@3227.44,5100.98 ; v1@4232.5,4540.08 R85.2@4232.5,4570.87 ; R89.2@4232.5,4679.95 v1@4232.5,4714.96
  Top Layer w19.7: v1(3858.86,4793.6) CN1.16@3858.86,4862.04 ; v1(3890.35,4793.6) CN1.15@3890.35,4862.04
  Top Layer w20: H2.1@3127.44,5235.02 3472.44,5235.02 3592.44,5115.02 v1(3812.44,5115.02)
  Top Layer w30: v1(3812.44,5115.02) C68.2@3856.07,5115.02 C69.2@3915.21,5115.02 R81.2@3981.38,5115.02
  Bottom Layer w12: H2.1@3127.44,5235.02 3192.44,5170.02 v1(3192.44,5101.02) v1(3192.44,4901.02) v1(3192.44,4801.02) v1(3192.44,4701.02) v1(3192.44,4501.02) ; v1(3812.44,5115.02) 3722.44,5115.02 3648,5040.58 3648,4647.88 3775.86,4520.02 4212.44,4520.02 v1(4232.44,4540.02) v1(4232.44,4715.02)
  Bottom Layer w30: v1(3812.44,5115.02) 3812.44,4925.02 3858.86,4878.6 v1(3858.86,4793.6) v1(3890.35,4793.6)
SFP_RX_N: C73.1 CN1.12 R92.2 | length 542.1
  Top Layer w5.4: CN1.12@3984.84,4862.04 3984.84,4812.57 3974.29,4802.02 3974.3,4783.17 3992.04,4765.42 4082.84,4765.42 4107.04,4789.62 4107.04,4904.33 4152.93,4950.22 4196.95,4950.22 4211.71,4964.98 R92.2@4232.44,4964.98 C73.1@4275.94,4964.98
SFP_RX_P: C72.1 CN1.13 R91.2 | length 559.3
  Top Layer w5.4: CN1.13@3953.35,4862.04 3953.35,4812.57 3963.89,4802.02 3963.89,4778.86 3987.73,4755.02 4087.15,4755.02 4117.44,4785.31 4117.44,4900.02 4157.24,4939.82 4196.95,4939.82 4211.71,4925.06 R91.2@4232.44,4925.06 C72.1@4275.94,4925.06
SFP_TX_N: C70.1 CN1.19 R84.2 R85.1 | length 1474.7
  Top Layer w5.4: CN1.19@3764.38,4862.04 3764.38,4812.57 3774.93,4802.02 3774.93,4722.82 3877.54,4620.21 4217.24,4620.21 R85.1@4232.5,4604.95 R84.2@4272.5,4604.95 4272.5,4605.08 4287.44,4620.02 4301.99,4620.02 v1(4309.33,4612.68)
  Bottom Layer w5.4: v1(4309.33,4612.68) 4316.67,4620.02 4342.44,4620.02 4363.5,4598.96 4363.5,4236.03 4474.71,4124.82 4602.64,4124.82 4617.44,4110.02 C70.1@4620.98,4110.02
SFP_TX_P: C71.1 CN1.18 R88.2 R89.1 | length 1457.1
  Top Layer w5.4: CN1.18@3795.88,4862.04 3795.88,4812.57 3785.33,4802.02 3785.33,4727.13 3881.85,4630.61 4217.24,4630.61 R89.1@4232.5,4645.87 R88.2@4272.5,4645.87 4287.35,4631.02 4302.59,4631.02 v1(4309.33,4637.76)
  Bottom Layer w5.4: v1(4309.33,4637.76) 4316.67,4630.42 4346.75,4630.42 4373.9,4603.27 4373.9,4240.34 4479.02,4135.22 4602.64,4135.22 4617.44,4150.02 C71.1@4620.98,4150.02
SPI_CLK: U2.6 U3.48 | length 861.5
  Top Layer w6: U3.48@5645.48,4581.85 5683.65,4620.02 5802.44,4620.02 6017.44,4835.02 6237.44,4835.02 6272.44,4870.02 6272.44,4915.02 6262.44,4925.02 U2.6@6206.42,4925.02
SPI_CS: U2.1 U3.54 | length 571.6
  Top Layer w6: U3.54@5578.62,4648.67 5762.44,4832.49 5762.44,4945.02 5842.44,5025.02 U2.1@5928.46,5025.02
SPI_D0: U2.5 U3.49 | length 688.9
  Top Layer w6: U3.49@5634.27,4593.02 5676.31,4635.02 5797.44,4635.02 6037.44,4875.02 U2.5@6206.42,4875.02
SPI_D1: U2.2 U3.53 | length 542.8
  Top Layer w6: U3.53@5589.72,4637.57 5777.44,4825.29 5777.44,4935.02 5817.44,4975.02 U2.2@5928.46,4975.02
TXD/GPIO02: pad.5 R21.2 TX.1 U3.46 | length 1221
  Top Layer w6: U3.46@5667.76,4559.57 5698.2,4590.02 5812.44,4590.02 6027.44,4805.02 6247.44,4805.02 6347.44,4905.02 6412.44,4905.02 6441.42,4933.99 6441.42,4958.89 6648.58,4958.89 6690.39,4917.07 pad.5@6691.42,4917.07
VBUS: DC1.1 R35.1 R44.1 USB1.A4B9 USB1.B4A9 | length 5415.1
  Top Layer w23.6: USB1.A4B9@3191.41,3411.14 3192.44,3412.18 3192.44,3505.02 3237.63,3550.21 DC1.1@3270.97,3550.21 3317.25,3550.21 3380.41,3487.06 USB1.B4A9@3380.41,3411.14
  Top Layer w31: v1(5432.44,5200.02) v1(5432.44,5222.82) v1(5432.44,5244.89) R35.1@5432.44,5325.36 ; v1(6487.44,5200.02) v1(6487.44,5222.82) v1(6487.44,5244.89) R44.1@6487.44,5325.36
  Top Layer w78: DC1.1@3270.97,3550.21 3270.97,3753.54 3522.44,4005.02 v7(3522.44,4265.02)
  Bottom Layer w78: v7(3522.44,4265.02) 3442.44,4345.02 3442.44,5065.02 3597.44,5220.02 v1@6487.44,5220.02
XTALI: C37.2 U3.84 X2.1 | length 294.8
  Top Layer w7.9: C37.2@4967.23,4660.24 5015.1,4708.11 5016.47,4708.11 U3.84@5176.07,4548.47
XTALO: C36.1 U3.83 X2.3 | length 391.2
  Top Layer w7.9: C36.1@5076.88,4840.59 5039.01,4802.72 5027.64,4802.72 5007.06,4782.13 5007.06,4770.41 5062.44,4715.03 5062.44,4684.3 U3.83@5187.17,4559.57
"": U1.17 U1.18 U1.19 U1.20 U3.15 U3.16 U3.19 U3.35 U3.36 U3.38 U3.39 U3.63 U3.64 U3.65 U3.66 USB1.A6 USB1.A7 USB1.A8 USB1.B6 USB1.B7 USB1.B8
  other v5: 4987.76,5420.34 5027.13,5420.34 6052.76,5420.34 6092.13,5420.34 4987.76,5459.71 5027.13,5459.71 6052.76,5459.71 6092.13,5459.71

## Polygon pours and split planes (outlines as drawn)
GND on Bottom Layer (solid, remove dead copper, pour order 0): 3000,3000.02 6967.48,3000.02 6967.48,5915.41 3000,5915.41
GND on Top Layer (solid, remove dead copper, pour order 1): 4422.04,4050.02 4422.02,4050 4382.29,4050 4207.44,3875.02 4207.31,3000 3017.29,3000 3017.29,5871.4 3039.24,5935.04 6942.29,5940.06 6942.29,3010 6757.29,3010 6757.29,3750 6447.29,4060 6117.29,4060 5807.29,4370 5427.48,3990.02 5039.58,4378.22 5132.35,4469.94 5037.29,4565 4862.42,4565 4734.94,4437.52 4794.94,4377.52 4744.94,4327.52 4842.44,4230.02 4842.44,4185.02 4707.44,4050.02

## Keep-outs
Top Layer:
  region net "": 5508.01,4760.72 5523.01,4745.72 5483.01,4705.72 5468.01,4720.72
  region net "": 5563.77,4705 5578.77,4690 5538.77,4650 5523.77,4665
  region net "": 5708.48,4560.26 5723.48,4545.26 5683.48,4505.26 5668.48,4520.26
  region net "": 5741.92,4526.81 5756.92,4511.81 5716.92,4471.81 5701.92,4486.81
  region net "": 5808.67,4460.06 5823.67,4445.06 5783.67,4405.06 5768.67,4420.06
  region net "": 5320.2,4734.05 5335.2,4749.05 5375.2,4709.05 5360.2,4694.05
  region net "": 5130.84,4544.68 5145.84,4559.68 5185.84,4519.68 5170.84,4504.68
  region net "": 5086.29,4500.14 5101.29,4515.14 5141.29,4475.14 5126.29,4460.14
Board Outline Layer:
  lines w7.9 net "": 3597.48,3306.93 3597.48,3145.41 3126.46,3145.41 cw(c3126.46,3241.87) 3030,3241.87 3030,5804.86 cw(c3126.46,5804.86) 3126.46,5901.32 6791.81,5901.32 cw(c6791.81,5804.86) 6888.27,5804.86 6888.27,3241.87 cw(c6791.81,3241.87) 6791.81,3145.41 4167.48,3145.41 4167.48,3306.93

## Other copper
Top Layer:
  region net $3N4802: 5447.44,5365.02 5452.44,5370.02 5452.44,5425.02 5447.44,5430.02 5082.44,5430.02 5077.44,5425.02 5077.44,5395.02 5082.44,5390.02 5162.44,5390.02 5187.44,5365.02
  region net $3N9057: 6512.44,5365.02 6517.44,5370.02 6517.44,5425.02 6512.44,5430.02 6147.44,5430.02 6142.44,5425.02 6142.44,5395.02 6147.44,5390.02 6227.44,5390.02 6252.44,5365.02
  region net $3N4144: 5222.44,5595.02 5227.44,5600.02 5397.44,5600.02 5402.44,5595.02 5402.44,5455.02 5392.44,5445.02 5082.44,5445.02 5077.44,5450.02 5077.44,5485.02 5082.44,5490.02 5172.44,5490.02 5222.44,5540.02
  region net $3N9050: 6287.44,5595.02 6292.44,5600.02 6462.44,5600.02 6467.44,5595.02 6467.44,5455.02 6457.44,5445.02 6147.44,5445.02 6142.44,5450.02 6142.44,5485.02 6147.44,5490.02 6237.44,5490.02 6287.44,5540.02
  region net 3V3_R: 5397.44,5650.02 5402.44,5655.02 5402.44,5770.02 5397.44,5775.02 4682.44,5775.02 4677.44,5770.02 4677.44,5710.02 4682.44,5705.02 5167.44,5705.02 5222.44,5650.02
  region net 1V1_R: 6462.44,5650.02 6467.44,5655.02 6467.44,5770.02 6462.44,5775.02 5747.44,5775.02 5742.44,5770.02 5742.44,5710.02 5747.44,5705.02 6232.44,5705.02 6287.44,5650.02
  region net 8213B_1V0: 4746.09,4486.96 4740.38,4478.29 4752.24,4473.18 4759.65,4481.12
  region net 8213B_3V3: 4583.06,4269.84 4574.15,4275.39 4567.08,4268.32 4572.62,4259.4
  region net 3V3: 5145.03,4458.64 5132.64,4463.88 5127.05,4458.29 5132.3,4445.9
  region net 3V3: 5121.13,4315.31 5115.88,4302.92 5121.47,4297.33 5133.86,4302.58
  region net 1V1: 5373.49,4122.08 5368.08,4109.68 5373.52,4103.95 5385.89,4109.03
  region net 3V3: 5277.04,4159.4 5271.8,4147 5277.39,4141.42 5289.78,4146.66
  region net 1V1: 5284.45,4211.51 5279.35,4199.14 5285.06,4193.68 5297.46,4199.06
  region net 1V1: 5457.15,4099.09 5470.26,4094.19 5474.7,4098.24 5470.44,4111.23
  region net 1V1: 5217.48,4277.96 5212.13,4265.57 5217.63,4259.89 5230,4265.03
  region net 1V1: 5089.21,4403.16 5076.82,4408.4 5071.23,4402.82 5076.47,4390.42
  region net 3V3: 5410.69,4025.75 5405.44,4013.36 5411.03,4007.77 5423.42,4013.02
  region net 1V1: 5607.69,4248.04 5620.07,4242.8 5625.66,4248.39 5620.42,4260.77
  region net 3V3: 5609.73,4191.21 5622.12,4185.96 5627.71,4191.55 5622.47,4203.94
  region net 1V1: 5546.18,4188.09 5559.29,4183.21 5563.72,4187.27 5559.44,4200.26
  region net 3V3: 5542.91,4124.39 5555.3,4119.14 5560.89,4124.73 5555.64,4137.12
  region net 1V1: 5691.63,4332.05 5704.01,4326.77 5709.63,4332.33 5704.42,4344.71
  region net 1V1: 5717.45,4395.87 5722.38,4408.22 5716.52,4413.53 5704.09,4407.95
  region net 3V3: 5769.38,4383.01 5781.86,4388.07 5781.86,4395.97 5769.38,4401.03
  region net 3V3: 5678.53,4476.14 5690.81,4487.99 5690.64,4498.98 5678.24,4494.15
  region net 3V3: 5702.58,4469.46 5706.49,4481.46 5696.85,4482.99 5684.79,4472.27
  region net 1V1: 5496.26,4615.78 5501.51,4628.17 5495.92,4633.76 5483.53,4628.52
  region net 3V3: 5497.09,4667.1 5503.66,4679.56 5499.1,4686.18 5486.88,4681.94
  region net 3V3: 5401.15,4714.75 5388.75,4719.99 5383.17,4714.41 5388.41,4702.01
  region net 3V3: 5234.13,4547.73 5221.74,4552.97 5216.15,4547.39 5221.39,4534.99
Bottom Layer:
  region net 3V3: 5832.29,4420 5832.29,4330 5472.29,3970 5382.29,3970 5077.29,4275 5077.29,4285 5112.48,4320.19 5112.48,4444.81 5087.29,4470 5087.29,4485 5358.29,4756 5366.29,4756 5414.29,4708 5414.29,4697 5177.29,4460 5177.29,4290 5422.29,4045 5432.29,4045 5747.29,4360 5747.29,4390 5473.29,4664 5473.29,4676 5521.29,4724 5528.29,4724
  region net 8213B_3V3: 4501.83,4420.2 4511.49,4415.4 4517.06,4420.97 4512.27,4430.64
  region net 8213B_1V0: 4548.11,4417.55 4557.66,4413.82 4561.29,4421.37 4554.51,4430.85
  region net 8213B_1V0: 4746.36,4486.23 4742.68,4476.68 4751.02,4473.85 4760.34,4481.48
  region net 8213B_3V3: 4778.6,4495.33 4773.95,4485.68 4779.7,4480.27 4789.36,4485.22
  region net 8213B_3V3: 4798.27,4494.4 4802.39,4504.73 4798.15,4508.97 4787.83,4504.84
  region net 8213B_3V3: 4591.3,4517.33 4598.23,4508.17 4606.8,4509.68 4605.84,4519.89
  region net 8213B_1V0: 4823.06,4388.25 4812.74,4388.32 4811.54,4379.99 4820.96,4373.64
  region net 8213B_3V3: 4757.46,4274.86 4747.81,4279.39 4742.57,4273.46 4747.67,4263.81
  region net 8213B_1V0: 4674.82,4235.53 4670.46,4245.75 4662.16,4245.75 4660.06,4235.53
  region net 8213B_1V0: 4674.82,4235.53 4670.46,4245.75 4662.16,4245.75 4660.06,4235.53
  region net 8213B_3V3: 4589.84,4253.53 4599.37,4259.59 4598.31,4267.82 4587.96,4268.17

## Silkscreen, mask and mechanical layers (free items; w line width, h text height)
Top Silkscreen Layer:
  text "ACT /  READY" at 3459.55,5795.01 h32.56
  text "100 /  1000" at 3687.51,5795.01 h32.56
  text "100 /  1000" at 3887.51,5795.01 h32.56
  text "100 /  1000" at 4087.51,5795.01 h32.56
  text "100 /  1000" at 4287.51,5795.01 h32.56
Bottom Silkscreen Layer:
  text "+3.3V" at 3182.5,5250.03 h29.2 r180
  text "Tx Fault /  HW_TX" at 3199.21,5175.03 h32.56 r180
  text "Tx Disable /  N_RX" at 3205.13,5075.03 h32.56 r180
  text "MOD-DEF(2)" at 3188.91,4950.03 h29.2 r180
  text "MOD-DEF(1)" at 3188.91,4850.03 h29.2 r180
  text "MOD-DEF(0) /  N_TX" at 3205.13,4775.03 h32.56 r180
  text "Rate Select /  HW_RX" at 3208.09,4675.03 h32.56 r180
  text "LOS" at 3179.94,4550.03 h29.2 r180
  text "GND" at 3179.94,4450.03 h29.2 r180
  text "GND" at 3179.94,4350.03 h29.2 r180
Mech6:
  lines w7.9 net "": 3030,3245.41 3030,3145.41 3130,3145.41 ; 3030,5882.18 3030,5901.32 3048.66,5901.32 ; 3882.48,4700.64 3882.48,4717.4 ; 6869.61,3145.41 6888.27,3145.41 6888.27,3164.56 ; 6869.61,5901.32 6888.27,5901.32 6888.27,5882.18 ; 3882.48,4717.4 3882.48,4717.4
  lines w7.96 net "": 3687.44,5470.02 4469.49,5470.02
  text "P6LED0   ACT /  P6LED1   Ready" at 3212.92,5945.01 h32.56
  text "PxLED0--100M /  PxLED1--1000M" at 3650.88,5945.01 h32.56